# Altium PCB LimeSDR-Micro_mPCIe_1v4.PcbDoc (part 9 of 11)
Units mm, origin at the board's own origin, x right, y up, seen from the top; angles counter-clockwise.
Board outline 50.8 x 29.7 mm, 8 copper layers (Top, L2, L3, L4, L5, L6, L7, Bottom), stack 0.925 mm thick; 664 components, 386 nets, 2358 pads, 843 vias.
Unrouted connection lines stored in the file: 28.
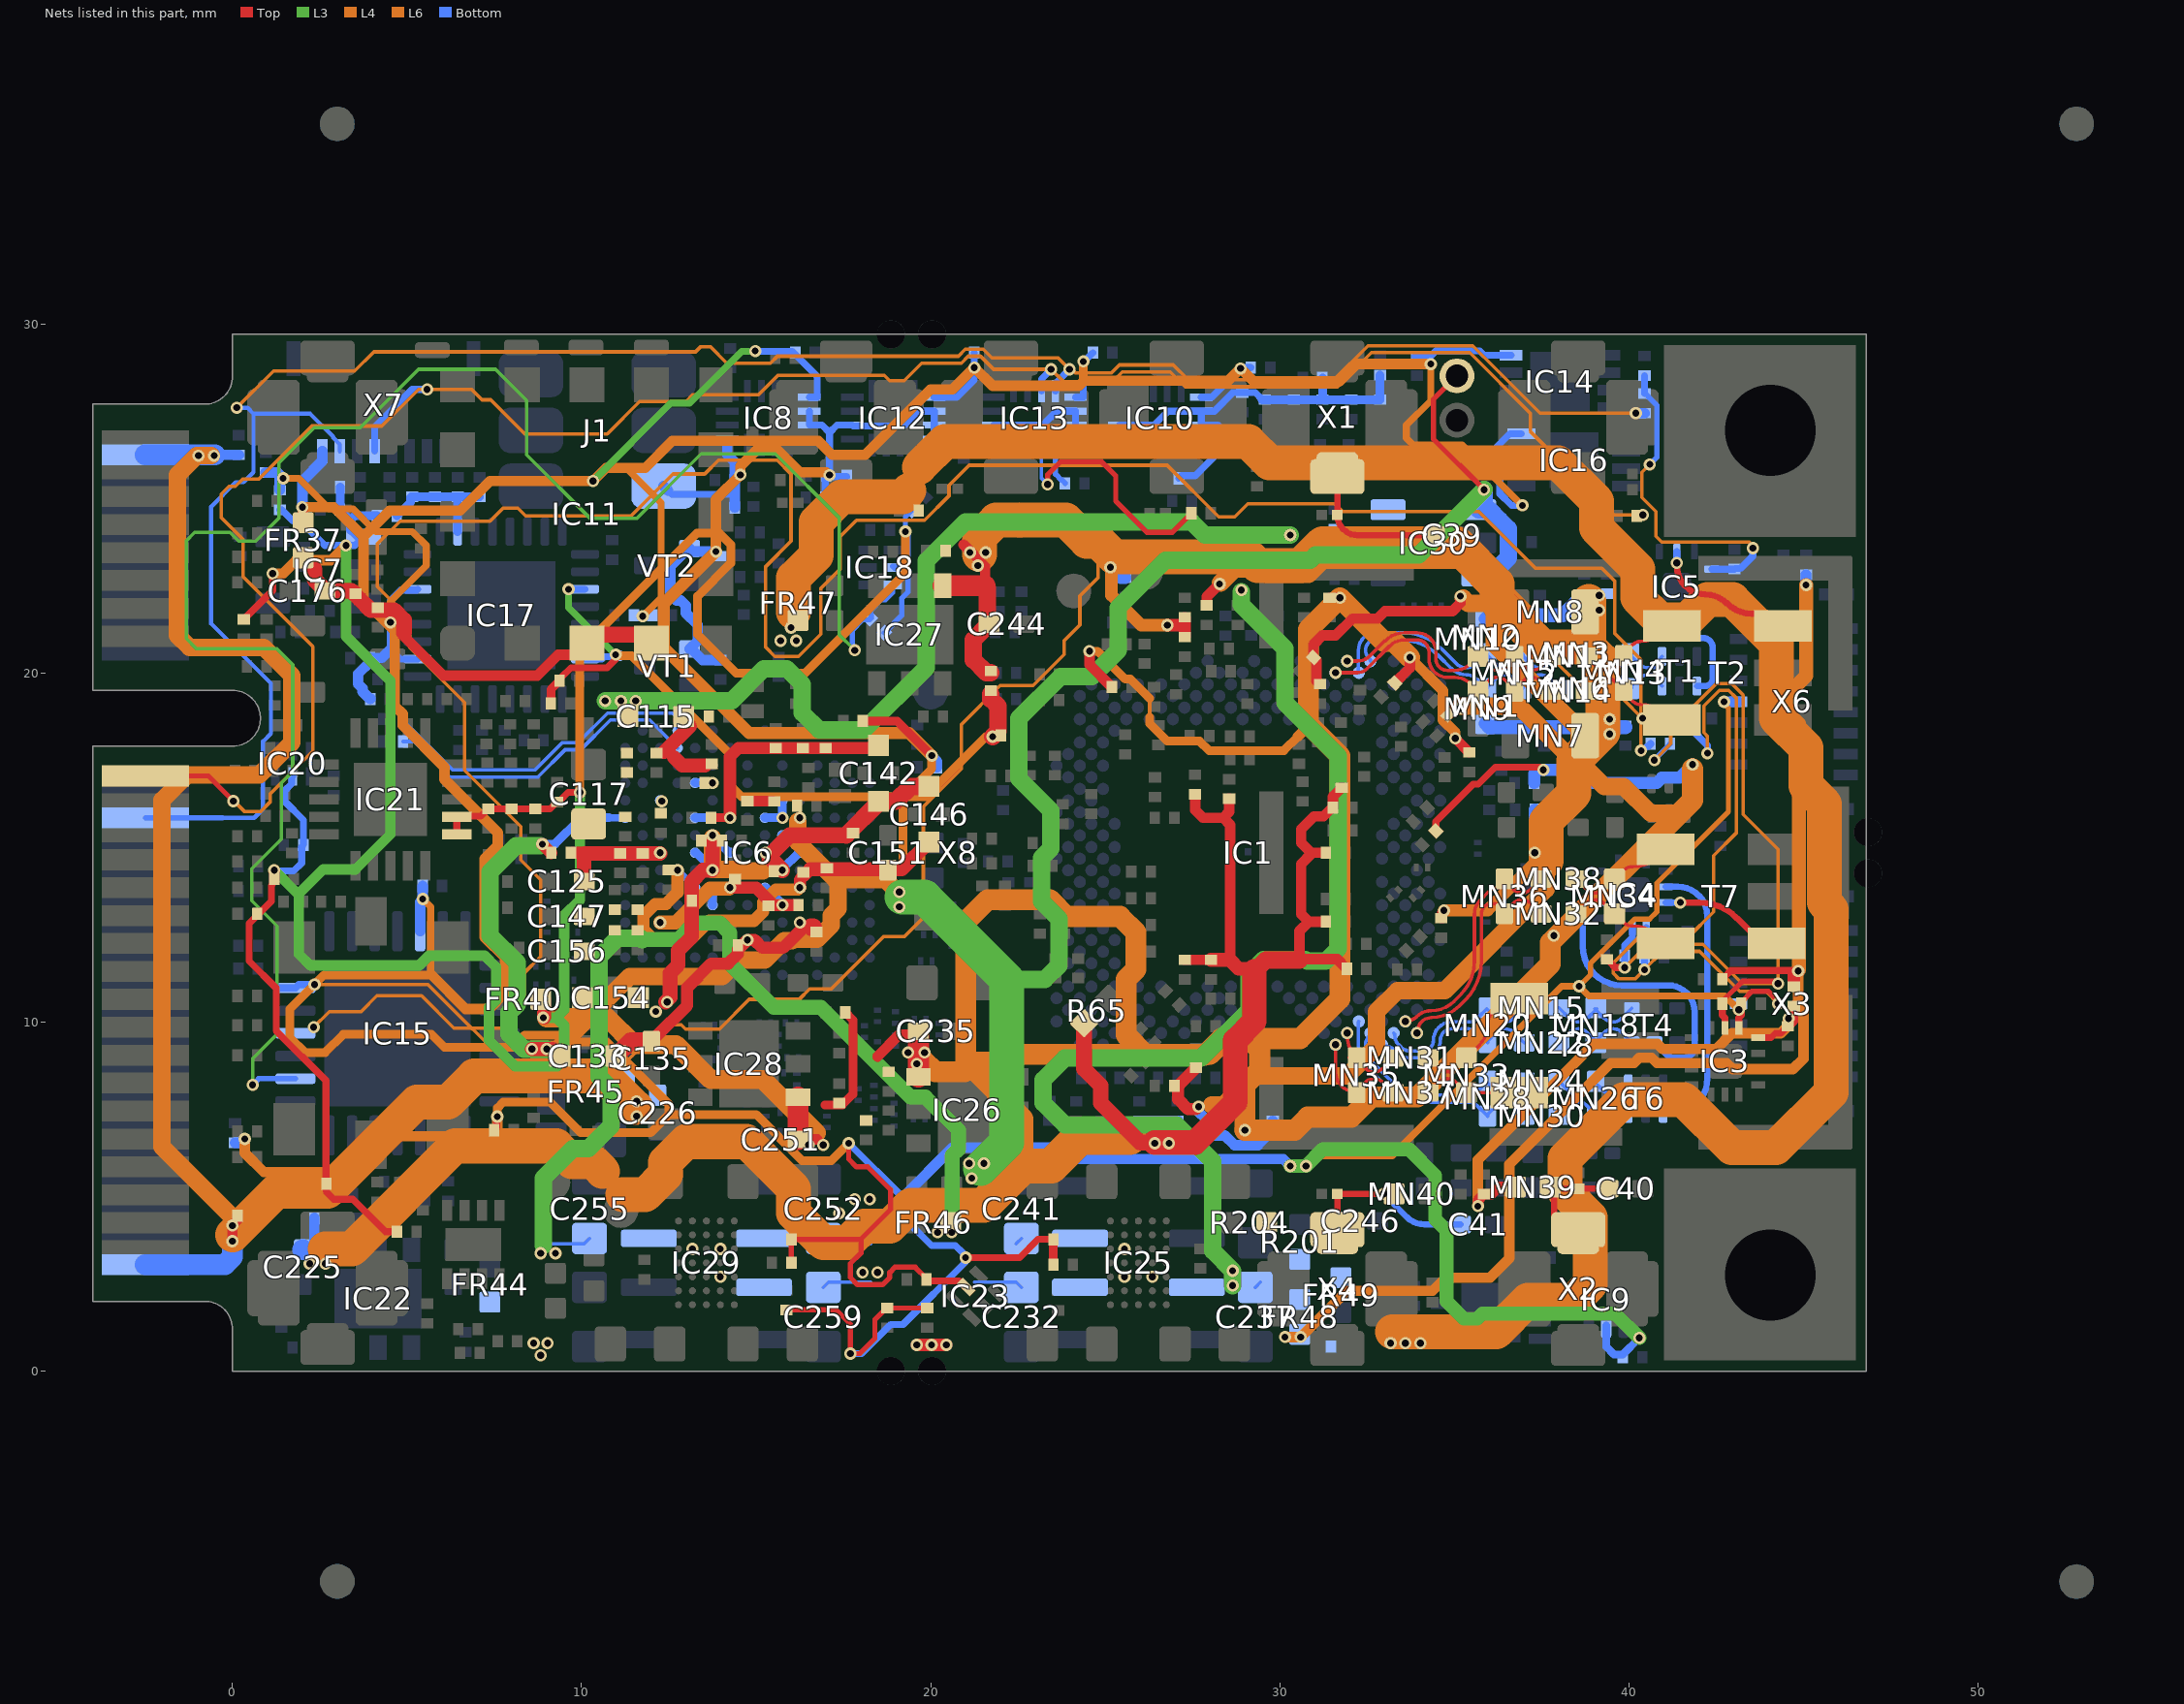
[diagram p13: the nets of this part, all layers, seen from the top]

## Via types
v1: diameter 0.35, hole 0.2, Top to Bottom, tented both sides, 684 vias
v2: diameter 0.35, hole 0.2, L5 to Bottom, tented both sides, 117 vias
v3: diameter 0.4, hole 0.2, Top to Bottom, tented both sides, 30 vias
v4: diameter 0.5, hole 0.2, Top to Bottom, tented both sides, 12 vias

## Nets (pads, with @x,y where several pads share a name; then routed paths per layer and width w, separated by ;. In a path a pad name is that pad's centre, name@x,y a point inside that pad or via, vN(x,y) a via of type N, cw(c..) or ccw(c..) an arc to the next point about the centre after c; other vN are vias at no path point) (continued)
RX1_W_A_N: IC1.AP10 MN35.1 MN37.2 | length 3
  Top w0.1: v1(31.598,9.351) 31.598,8.577 ccw(c32.175,8.577) 32.175,8 32.443,8.268 cw(c32.701,8.01) 32.701,8.375 ; 32.699,8.375 cw(c32.699,8.01) 32.957,8.268 MN37.2@33.25,7.975
RX1_W_A_P: IC1.AN9 MN31.2 MN35.2 | length 2.4
  Top w0.1: v1(31.931,9.684) 31.931,9.626 ccw(c32.851,9.626) MN35.2@32.2,8.975 MN35.2@31.995,8.975 ; MN35.2@32.175,8.95 32.443,8.682 ccw(c32.701,8.94) 32.701,8.575 ; 32.699,8.575 ccw(c32.699,8.94) 32.957,8.682 MN31.2@33.25,8.975
RX1_W_B_N: MN33.1 MN37.1 T8.4 | length 2.9
  Top w0.1: MN37.1@34.25,7.975 34.543,8.268 cw(c34.801,8.01) 34.801,8.375 ; 34.799,8.375 cw(c34.799,8.01) 35.057,8.268 MN33.1@35.325,8 ; MN33.1@35.35,7.975 T8.4@36.86,7.975
RX1_W_B_P: MN31.1 MN33.2 T8.6 | length 3.8
  Top w0.1: MN31.1@34.25,8.975 34.543,8.682 ccw(c34.801,8.94) 34.801,8.575 ; 34.799,8.575 ccw(c34.799,8.94) 35.057,8.682 MN33.2@35.325,8.95 ; MN33.2@35.35,8.975 35.72,9.345 ccw(c35.165,9.9) 35.95,9.9 ; 35.95,9.934 cw(c36.411,9.934) 36.085,10.26 36.085,10.27 36.227,10.412 36.237,10.412 cw(c36.86,9.789) T8.6@36.86,10.67
RX2_H: IC4.2 T6.1 | length 8.2
  Bottom w0.18: T6.1@40.983,7.38 41.244,7.38 ccw(c41.244,8.386) 42.25,8.386 42.25,13.029 ccw(c41.404,13.029) 41.404,13.875 IC4.2@41.053,13.875
RX2_H_A_N: IC1.AM8 MN28.1 MN30.2 | length 6.7
  Bottom w0.1: IC1.AM8@32.264,10.017 32.256,10.009 32.256,9.343 ccw(c33.175,9.343) 32.525,8.692 32.961,8.256 ccw(c34.293,9.589) 34.293,7.705 35.07,7.705 35.401,7.705 cw(c35.401,7.34) 35.659,7.598 MN28.1@35.927,7.33 ; MN28.1@35.952,7.305 MN28.1@35.927,7.33 ; MN30.2@37.002,7.305 36.709,7.598 ccw(c36.451,7.34) 36.452,7.704 ccw(c36.453,7.34) 36.196,7.598 MN28.1@35.927,7.33
RX2_H_A_P: IC1.AN7 MN24.2 MN28.2 | length 6
  Bottom w0.1: IC1.AN7@32.597,9.684 cw(c32.494,9.684) 32.566,9.611 ccw(c32.834,9.344) 32.456,9.344 ccw(c33.178,9.344) 32.667,8.833 33.1,8.4 ccw(c34.296,9.596) 34.296,7.905 35.07,7.905 ; 35.073,7.905 35.401,7.905 ccw(c35.401,8.269) 35.659,8.011 35.927,8.28 36.196,8.011 ccw(c36.453,8.269) 36.452,7.905 ccw(c36.451,8.269) 36.709,8.011 MN24.2@37.002,8.305
RX2_H_B_N: MN26.1 MN30.1 T6.3 | length 2.7
  Bottom w0.1: MN30.1@38.002,7.305 38.296,7.598 cw(c38.553,7.34) 38.553,7.705 ; 38.551,7.705 cw(c38.551,7.34) 38.809,7.598 MN26.1@39.052,7.355 ; MN26.1@39.027,7.33 MN26.1@39.052,7.355 ; MN26.1@39.077,7.33 MN26.1@39.052,7.355 ; T6.3@39.983,7.38 cw(c40.103,7.5) 39.933,7.5 ccw(c39.728,7.5) 39.728,7.705 39.553,7.705 ccw(c39.553,7.34) 39.296,7.598 MN26.1@39.052,7.355
RX2_H_B_P: MN24.1 MN26.2 T6.4 | length 2.7
  Bottom w0.1: MN24.1@38.002,8.305 38.296,8.011 ccw(c38.553,8.269) 38.553,7.905 ; 38.551,7.905 ccw(c38.551,8.269) 38.809,8.011 MN26.2@39.077,8.28 ; MN26.2@39.027,8.28 39.296,8.011 ccw(c39.553,8.269) 39.553,7.905 39.728,7.905 ccw(c39.728,8.109) 39.933,8.109 cw(c40.103,8.109) T6.4@39.983,8.23
RX2_L: IC4.9 T4.2 | length 8.4
  Bottom w0.18: IC4.9@39.148,13.425 39,13.425 ccw(c39,13.1) 38.778,13.337 ccw(c39,13.1) 38.675,13.1 38.675,12.175 ccw(c39.8,12.175) 39.8,11.05 41.129,11.05 cw(c41.129,10.295) 41.885,10.295 41.885,9.28 cw(c41.585,9.28) 41.585,8.98 41.31,8.98 cw(c41.31,9.317) 41.071,9.079 T4.2@40.735,9.415
RX2_L_A_N: IC1.AP6 MN20.1 MN22.2 | length 5.1
  Bottom w0.1: IC1.AP6@32.93,9.351 ccw(c33.012,9.433) 33.012,9.317 cw(c33.012,8.971) 33.256,9.216 ; 33.257,9.216 33.336,9.136 ccw(c33.724,9.524) 33.724,8.975 34.1,8.975 ccw(c34.1,9.475) 34.6,9.475 cw(c34.93,9.475) 34.93,9.805 35.401,9.805 cw(c35.401,9.44) 35.659,9.698 MN20.1@35.927,9.43 ; MN20.1@35.952,9.405 MN20.1@35.927,9.43 ; MN22.2@37.002,9.405 36.709,9.698 ccw(c36.451,9.44) 36.452,9.805 ccw(c36.453,9.44) 36.196,9.698 MN20.1@35.927,9.43
RX2_L_A_P: IC1.AN5 MN15.2 MN20.2 | length 4.9
  Bottom w0.1: IC1.AN5@33.263,9.684 cw(c33.18,9.602) 33.297,9.602 ccw(c33.643,9.602) 33.398,9.357 33.477,9.277 ccw(c33.725,9.525) 33.725,9.175 34.1,9.175 ccw(c34.1,9.475) 34.4,9.475 cw(c34.93,9.475) 34.93,10.005 35.401,10.005 ccw(c35.401,10.369) 35.659,10.111 35.927,10.38 36.196,10.111 ccw(c36.453,10.369) 36.452,10.005 ccw(c36.451,10.369) 36.709,10.111 MN15.2@37.002,10.405
RX2_L_B_N: MN18.1 MN22.1 T4.3 | length 2.7
  Bottom w0.1: MN22.1@38.002,9.405 38.296,9.698 cw(c38.553,9.44) 38.552,9.805 cw(c38.552,9.44) 38.809,9.698 MN18.1@39.052,9.455 ; MN18.1@39.027,9.43 MN18.1@39.052,9.455 ; MN18.1@39.077,9.43 MN18.1@39.052,9.455 ; T4.3@40.085,9.415 39.794,9.705 ccw(c39.553,9.464) 39.553,9.805 ccw(c39.553,9.44) 39.296,9.698 MN18.1@39.052,9.455
RX2_L_B_P: MN15.1 MN18.2 T4.4 | length 2.7
  Bottom w0.1: MN15.1@38.002,10.405 38.296,10.111 ccw(c38.553,10.369) 38.552,10.005 ccw(c38.552,10.369) 38.809,10.111 MN18.2@39.052,10.354 ; MN18.2@39.027,10.38 MN18.2@39.052,10.354 ; MN18.2@39.077,10.38 MN18.2@39.052,10.354 ; T4.4@40.085,10.395 39.794,10.104 cw(c39.553,10.345) 39.553,10.005 cw(c39.553,10.369) 39.296,10.111 MN18.2@39.052,10.354
RX2_W: IC4.3 T7.3 | length 3.5
  Top w0.18: v1(41.475,13.425) 42.014,13.425 cw(c42.014,11.889) 43.1,12.975 43.553,12.522 ccw(c44.197,13.165) T7.3@44.197,12.255
  Bottom w0.18: IC4.3@41.053,13.425 v1(41.475,13.425)
RX2_W_A_N: IC1.AM4 MN36.1 MN38.2 | length 7
  Top w0.1: v1(33.596,10.017) cw(c33.678,9.935) 33.678,10.051 ccw(c33.678,10.397) 33.923,10.152 ; 33.923,10.153 cw(c34.338,9.738) 34.338,10.325 ccw(c34.338,11.258) 34.998,10.598 35.168,10.768 ccw(c34.187,11.75) 35.575,11.75 35.575,13.087 cw(c36.149,13.087) 35.743,13.493 35.974,13.724 ; 35.974,13.724 cw(c36.278,13.42) 36.278,13.85 36.456,13.85 MN36.1@36.547,13.941 ; MN36.1@36.438,14.1 36.413,14.075 MN36.1@36.547,13.941 ; MN38.2@37.488,14.1 37.195,13.807 cw(c36.937,14.065) 36.938,13.7 cw(c36.939,14.065) 36.681,13.807 MN36.1@36.547,13.941
RX2_W_A_P: IC1.AN3 MN32.2 MN36.2 | length 6.6
  Top w0.1: v1(33.929,9.684) ccw(c33.846,9.766) 33.963,9.766 cw(c34.309,9.766) 34.064,10.011 cw(c34.339,9.736) 34.339,10.125 ccw(c34.34,11.256) 35.139,10.456 35.311,10.628 ccw(c34.19,11.749) 35.775,11.749 35.775,13.087 cw(c36.088,13.087) 36.088,13.4 cw(c36.088,13.159) 36.258,13.329 36.438,13.15 36.681,13.393 cw(c36.939,13.135) 36.938,13.5 cw(c36.937,13.135) 37.195,13.393 MN32.2@37.488,13.1
RX2_W_B_N: MN34.1 MN38.1 T7.6 | length 3.1
  Top w0.1: MN38.1@38.488,14.1 38.781,13.807 ccw(c39.039,14.065) 39.039,13.7 ; 39.037,13.7 ccw(c39.037,14.065) 39.295,13.807 MN34.1@39.563,14.075 ; MN34.1@39.588,14.1 39.806,14.318 cw(c40.125,13.998) 40.125,14.45 ccw(c40.125,15.483) 40.856,14.753 T7.6@41.048,14.945
RX2_W_B_P: MN32.1 MN34.2 T7.4 | length 2.8
  Top w0.1: MN32.1@38.488,13.1 38.781,13.393 cw(c39.039,13.135) 39.039,13.5 ; 39.037,13.5 cw(c39.037,13.135) 39.295,13.393 MN34.2@39.563,13.125 ; MN34.2@39.806,12.882 ccw(c40.125,13.202) 40.125,12.75 cw(c40.125,11.717) 40.856,12.447 T7.4@41.048,12.255
RX_SW2: IC15.25 R60.2 | length 76.3
  L4 w0.1: v1(2.325,9.85) 2.775,10.3 3.683,10.3 4.133,10.75 5.417,10.75 6.342,9.825 7.675,9.825 8.35,10.5 8.35,11.4 8.825,11.875 8.825,14.075 8.262,14.638 8.262,15.595 6.65,17.208 6.65,19.15 5.075,20.725 5.075,21.55 4.15,22.475 4.15,23.7 4.8,24.35 7.375,24.35 7.75,24.725 8.175,24.725 8.4,24.5 11.417,24.5 12.617,25.7 13.525,25.7 13.925,26.1 15.6,26.1 16,25.7 16,23.775 15.275,23.05 15.275,20.738 15.538,20.475 16.212,20.475 16.85,21.113 16.85,22.425 17.4,22.975 17.4,23.9 17.875,24.375 19.825,24.375 20.525,25.075 20.525,25.375 21.1,25.95 26.775,25.95 28.25,24.475 28.71,24.475 29.085,24.85 31.575,24.85 31.8,24.625 35.7,24.625 37.325,23 39.225,23 39.6,22.625 39.6,21.125 40.35,20.375 v1(40.35,17.775)
  Bottom w0.2: v1(40.35,17.775) 40.391,17.775 40.516,17.9 40.57,17.9 40.62,17.95 R60.2@40.62,17.975
RX_SW2_DIV: C44.1 C46.1 IC3.6 IC4.6 R60.1 R64.1 | length 22.7
  Top w0.15: C44.1@42.68,10.525 42.73,10.575 42.73,10.643 43.262,11.175 v1@44.2,11.175
  Top w0.2: R64.1@39.375,11.795 39.4,11.795 39.45,11.745 39.45,11.72 39.608,11.562 39.877,11.562 v1(39.879,11.56) ; C44.1@42.68,10.525 42.68,10.195 42.75,10.125 IC3.6@42.75,9.827
  L4 w0.1: v1(39.879,11.56) 40.543,12.225 42.125,12.225 43.25,11.1 v1(44.275,11.1) 44.275,14.95 43.275,15.95 43.275,19.367 42.942,19.7 42.508,19.7 41.2,18.392 41.2,17.97 v1(40.73,17.5)
  Bottom w0.15: v1(40.73,17.5) 40.73,17.525 40.743,17.525 41.18,17.963 R60.1@41.18,17.975
  Bottom w0.2: v1(39.879,11.56) C46.1@39.879,11.91 39.879,12.204 40.1,12.425 IC4.6@40.1,12.697
RX_SW3: IC15.27 R61.2 | length 53
  L6 w0.1: v2(2.35,11.075) 5.6,11.075 8.2,8.475 10.9,8.475 12.35,9.925 12.85,9.925 12.975,9.8 13.95,9.8 14.8,10.65 16.234,10.65 16.534,10.95 17.15,10.95 18.65,12.45 19.25,12.45 19.79,12.99 19.79,16.165 20.875,17.25 20.875,18.525 21.987,19.637 22.938,19.637 23.825,20.525 23.825,20.925 24.275,21.375 24.275,22.209 24.8,22.734 24.8,23.135 25.315,23.65 29.4,23.65 29.825,23.225 30.65,23.225 31.075,23.65 35.4,23.65 37.35,21.7 37.35,20.875 38.975,19.25 39.84,19.25 v2(40.39,18.7)
  Bottom w0.2: IC15.27@1.325,10.975 IC15.27@1.8,10.975 1.9,11.075 v2(2.35,11.075)
RX_SW3_DIV: C45.1 C47.1 IC3.5 IC4.5 R61.1 R63.1 | length 23.7
  Top w0.15: C45.1@43.22,10.573 43.522,10.875 44.002,10.875 44.275,10.602 v1@44.275,10.55
  Top w0.2: IC3.5@43.15,9.827 43.15,10.125 43.22,10.195 C45.1@43.22,10.525 C45.1@43.22,10.573
  L4 w0.1: v1(42.25,17.7) 42.25,18.19 42.15,18.29 42.15,19.06 42.59,19.5 42.86,19.5 43.075,19.285 43.075,15.413 42.429,14.766 42.429,13.154 41.7,12.425 40.284,12.425 39.55,11.691 39.55,11.4 39.715,11.235 40.18,11.235 v1(40.445,11.5) 40.97,12.025 42.025,12.025 43.175,10.875 43.925,10.875 v1(44.275,10.525)
  Bottom w0.2: v1(40.445,11.5) C47.1@40.445,11.85 40.5,11.905 IC4.5@40.5,12.697 ; R61.1@41.175,18.7 R63.1@41.815,18.7 41.815,18.36 42.25,17.925 v1(42.25,17.7)
RXA: C40.1 ESD2.1 MN39.1 X2.1 | length 3.9
  Top w0.18: MN39.1@37.75,5.225 MN39.1@37.8,5.225 ; MN39.1@37.75,5.275 MN39.1@37.8,5.225 ; X2.1@38.25,4.35 X2.1@38.55,4.05 ; X2.1@38.55,3.95 38.25,3.95 37.865,4.335 37.865,5.16 MN39.1@37.8,5.225 ; C40.1@39.35,5.075 39.2,5.225 MN39.1@37.8,5.225
RXB: C41.1 ESD3.1 MN40.1 X4.1 | length 5.2
  Top w0.18: X4.1@31.65,4.05 ESD3.1@31.65,5.075 v1(32.975,5.075) MN40.1@33.275,5.075
  Bottom w0.18: v1(32.975,5.075) 33.637,4.413 ccw(c34.152,4.929) 34.152,4.2 C41.1@35.177,4.2
SMB_CLK_CTRL: IC15.23 IC18.6 R155.1 | length 53.2
  L3 w0.1: v1(0.575,8.2) 0.575,8.95 1.275,9.65 1.275,12.75 0.55,13.475 0.55,14.392 1.4,15.242 1.4,16.85 1.725,17.175 1.725,20.233 1.258,20.7 -1.042,20.7 -1.325,20.983 -1.325,23.785 -1.085,24.025 -0.075,24.025 0.175,23.775 0.667,23.775 1.329,24.437 1.329,26.012 2.342,27.025 3.658,27.025 5.333,28.7 7.534,28.7 8.425,27.809 8.425,26.25 10.25,24.425 11.575,24.425 13.425,26.275 15.55,26.275 17.375,24.45 17.375,21.1 v1(17.825,20.65)
  Bottom w0.15: v1(0.575,8.2) 0.75,8.375 IC15.23@1.8,8.375 ; v1@17.75,20.65 17.787,20.687 17.787,20.742 17.75,20.779 17.75,21.22 18.06,21.53 18.259,21.53 R155.1@18.277,21.548 18.295,21.566 18.295,21.672 18.285,21.681 18.285,21.805 18.58,22.1 18.704,22.1 18.912,22.308 IC18.6@18.912,22.525 IC18.6@18.912,22.55
T0_N: C114.2 IC6.R4 | length 9.6
  Bottom w0.1: C114.2@4.865,18.668 6.314,17.219 8.662,17.219 9.444,18 9.892,18 10.742,18.85 12.6,18.85 12.751,18.699 IC6.R4@12.751,18.35
T0_P: C112.2 IC6.P4 | length 9.3
  Bottom w0.1: C112.2@4.885,18.037 5.213,18.037 6.231,17.019 8.745,17.019 9.526,17.8 9.975,17.8 10.825,18.65 11.951,18.65 IC6.P4@12.751,17.85
TDD0_GPIO: IC13.12 R59.2 X7.2 X8.20 | length 63.8
  L4 w0.1: v1(0.125,27.6) 1.175,28.65 3.5,28.65 4.05,29.2 13.265,29.2 13.415,29.35 13.685,29.35 14.16,28.875 15.409,28.875 15.609,29.075 17.925,29.075 20.792,29.075 20.992,29.275 21.508,29.275 21.758,29.025 23.65,29.025 v1(23.975,28.7)
  L6 w0.1: v1(23.975,28.7) 24.043,28.7 24.143,28.6 25.185,28.6 25.41,28.825 26.95,28.825 27.375,28.4 31.55,28.4 32.525,29.375 35.525,29.375 37.455,27.445 v2(40.2,27.445)
  Bottom w0.12: -0.293,15.85 0.625,15.85 0.875,16.1 0.875,18.04 1.1,18.265 1.1,19.7 -0.61,21.41 -0.61,24.765 0.09,25.465 0.315,25.465 0.6,25.75 0.6,27.425 ; v1(0.125,27.6) 0.425,27.6 0.6,27.425 ; X7.2@3.075,26.35 3.075,26.55 2.885,26.74 2.885,26.766 2.226,27.425 0.6,27.425
  Bottom w0.14: X8.20@-2.5,15.85 -0.293,15.85
  Bottom w0.2: IC13.12@23.575,28.075 23.575,28.3 23.6,28.325 23.605,28.325 v1@23.978,28.697
  Bottom w0.3: v2(40.2,27.445) R59.2@40.45,27.445
TDD0_GPIO_LS: IC13.1 R120.2 | length 1.3
  Bottom w0.15: IC13.1@23.575,26.575 23.575,25.695 23.745,25.525 23.77,25.525 23.845,25.45 R120.2@23.845,25.425
TDD1_GPIO: IC13.11 R229.1 X7.4 X8.17 | length 64.8
  Top w0.14: X8.17@-2.5,17.25 -2.3,17.05 -0.695,17.05 v1(0.025,16.33)
  L4 w0.1: v1@-0.05,16.33 v1(0.025,16.33) 0.045,16.33 0.35,16.025 0.8,16.025 1.075,16.3 1.075,16.533 2.304,17.762 2.304,20.756 0.3,22.76 0.3,23.825 -0.325,24.45 -0.325,25.125 -0.1,25.35 0.085,25.35 0.285,25.55 0.75,25.55 2.275,27.075 4.275,27.075 5.325,28.125 v1(5.575,28.125) 6.85,28.125 7.15,27.825 7.4,27.825 8.375,26.85 10.735,26.85 11.66,27.775 12.992,27.775 13.192,27.975 15.075,27.975 15.625,28.525 18.675,28.525 18.825,28.375 19.24,28.375 19.74,28.875 20.875,28.875 21.075,29.075 21.425,29.075 21.8,28.7 v1(23.45,28.7)
  L6 w0.1: v1(23.45,28.7) 23.8,28.35 25.217,28.35 25.492,28.625 26.867,28.625 27.292,28.2 31.65,28.2 32.625,29.175 35.442,29.175 37.175,27.442 37.175,26.925 39.575,24.525 v1(40.4,24.525)
  Bottom w0.2: X7.4@4.075,26.35 4.075,27.05 5.15,28.125 v1(5.575,28.125) ; IC13.11@23.175,28.075 23.175,28.425 v1(23.45,28.7)
TDD1_GPIO_LS: IC13.2 R121.2 | length 7.2
  Top w0.15: v1(23.35,25.4) 23.35,25.675 23.725,26.05 24.9,26.05 25.3,25.65 25.3,24.925 26.2,24.025 26.915,24.025 R121.2@27.465,24.575
  Bottom w0.1: IC13.2@23.175,26.525 23.175,25.575 v1(23.35,25.4)
TX1_1: IC5.11 T1.1 | length 3
  Bottom w0.18: IC5.11@41.375,21.475 41.375,21.275 ccw(c41.65,21.275) 41.65,21 42.125,21 cw(c42.125,20.725) 42.4,20.725 42.4,19.837 cw(c42.188,19.837) 42.188,19.625 T1.1@41.951,19.625
TX1_1_A_N: IC1.A7 MN1.1 MN5.1 MN6.2 | length 7.2
  Bottom w0.1: IC1.A7@32.597,20.34 ccw(c32.494,20.34) 32.566,20.413 32.546,20.433 cw(c32.766,20.652) 32.456,20.652 cw(c32.766,20.652) 32.546,20.871 cw(c32.736,20.681) 32.736,20.95 33.448,20.95 cw(c33.448,19.395) 34.548,20.494 34.912,20.13 ccw(c35.347,20.565) 35.347,19.95 35.349,19.95 cw(c35.349,19.585) 35.607,19.843 MN1.1@35.9,19.55 36.193,19.843 cw(c36.451,19.585) 36.45,19.95 cw(c36.449,19.585) 36.707,19.843 MN5.1@36.95,19.6 ; MN5.1@36.925,19.575 MN5.1@36.95,19.6 ; MN5.1@36.975,19.575 MN5.1@36.95,19.6 ; MN6.2@38,19.55 37.707,19.843 ccw(c37.449,19.585) 37.45,19.95 ccw(c37.451,19.585) 37.193,19.843 MN5.1@36.95,19.6
TX1_1_A_P: IC1.B8 MN2.1 MN3.1 MN5.2 | length 7.8
  Bottom w0.1: IC1.B8@32.264,20.007 32.256,20.015 32.256,20.653 cw(c32.763,20.653) 32.404,21.012 32.405,21.013 cw(c32.735,20.683) 32.735,21.15 33.531,21.15 cw(c33.531,19.595) 34.631,20.694 35.052,20.273 ccw(c35.349,20.57) 35.349,20.15 ccw(c35.349,20.515) 35.607,20.257 MN2.1@35.875,20.525 ; MN2.1@35.9,20.55 36.193,20.257 ccw(c36.451,20.515) 36.45,20.15 ccw(c36.449,20.515) 36.707,20.257 MN5.2@36.95,20.5 ; MN5.2@36.925,20.525 MN5.2@36.95,20.5 ; MN5.2@36.975,20.525 MN5.2@36.95,20.5 ; MN3.1@38,20.55 37.707,20.257 cw(c37.449,20.515) 37.45,20.15 cw(c37.451,20.515) 37.193,20.257 MN5.2@36.95,20.5
TX1_1_B_N: MN4.2 MN6.1 T1.3 | length 2.6
  Bottom w0.1: MN6.1@39,19.55 39.293,19.843 cw(c39.551,19.585) 39.55,19.95 cw(c39.549,19.585) 39.807,19.843 MN4.2@40.05,19.6 ; MN4.2@40.025,19.575 MN4.2@40.05,19.6 ; MN4.2@40.075,19.575 MN4.2@40.05,19.6 ; T1.3@40.951,19.625 cw(c41.072,19.746) 40.901,19.746 ccw(c40.697,19.746) 40.697,19.95 40.551,19.95 ccw(c40.551,19.585) 40.293,19.843 MN4.2@40.05,19.6
TX1_1_B_P: MN3.2 MN4.1 T1.4 | length 2.6
  Bottom w0.1: MN3.2@39,20.55 39.293,20.257 ccw(c39.551,20.515) 39.55,20.15 ccw(c39.549,20.515) 39.807,20.257 MN4.1@40.05,20.5 ; MN4.1@40.025,20.525 MN4.1@40.05,20.5 ; MN4.1@40.075,20.525 MN4.1@40.05,20.5 ; T1.4@40.951,20.475 ccw(c41.072,20.354) 40.901,20.354 cw(c40.697,20.354) 40.697,20.15 40.551,20.15 cw(c40.551,20.515) 40.293,20.257 MN4.1@40.05,20.5
TX1_2: IC5.5 T2.1 | length 3.4
  Top w0.18: v1(41.375,23.15) 41.375,23.071 ccw(c42.196,23.071) 42.196,22.25 cw(c42.196,21.396) 42.8,22 ccw(c43.524,22.724) 43.524,21.7 T2.1@43.675,21.7 ; T2.1@44.346,21.414 T2.1@44.415,21.345
  Bottom w0.2: v1(41.375,23.15) IC5.5@41.375,23.475
TX1_2_A_N: IC1.B10 MN9.1 MN12.2 MN14.1 | length 8
  Top w0.1: v1(31.597,20.007) 32.218,20.007 ccw(c32.218,20.402) 32.498,20.123 33.148,20.773 cw(c33.575,20.346) 33.575,20.95 33.925,20.95 cw(c33.925,20.6) 34.275,20.6 34.275,20.4 ccw(c34.8,20.4) 34.8,19.875 35.012,19.875 cw(c35.012,19.24) 35.461,19.689 MN9.1@35.675,19.475 35.968,19.768 cw(c36.226,19.51) 36.225,19.875 cw(c36.224,19.51) 36.482,19.768 36.725,19.525 MN12.2@36.7,19.5 ; MN12.2@36.7,19.5 36.968,19.768 cw(c37.226,19.51) 37.225,19.875 cw(c37.224,19.51) 37.482,19.768 MN14.1@37.775,19.475
TX1_2_A_P: IC1.A9 MN10.1 MN11.2 MN12.1 | length 7.7
  Top w0.1: v1(31.931,20.34) 32.217,20.34 ccw(c32.217,20.86) 32.584,20.492 ; 32.631,20.539 32.585,20.492 ; MN11.2@37.775,20.475 37.482,20.182 cw(c37.224,20.44) 37.225,20.075 cw(c37.226,20.44) 36.968,20.182 36.7,20.45 36.725,20.425 36.482,20.182 cw(c36.224,20.44) 36.225,20.075 cw(c36.226,20.44) 35.968,20.182 MN10.1@35.675,20.475 35.461,20.261 cw(c35.012,20.71) 35.012,20.075 34.8,20.075 cw(c34.8,20.4) 34.475,20.4 34.475,20.6 ccw(c33.925,20.6) 33.925,21.15 33.574,21.15 ccw(c33.574,20.348) 33.007,20.915 32.584,20.492
TX1_2_B_N: MN13.1 MN14.2 T2.4 | length 3.1
  Top w0.1: MN14.2@38.775,19.475 39.068,19.768 cw(c39.326,19.51) 39.326,19.875 ; 39.324,19.875 cw(c39.324,19.51) 39.582,19.768 MN13.1@39.85,19.5 ccw(c39.971,19.5) 39.885,19.415 40.112,19.188 ccw(c40.325,19.402) 40.325,19.1 cw(c40.325,17.977) 41.119,18.771 T2.4@41.235,18.655
TX1_2_B_P: MN11.1 MN13.2 T2.6 | length 3.1
  Top w0.1: MN11.1@38.775,20.475 39.068,20.182 ccw(c39.326,20.44) 39.326,20.075 ; 39.324,20.075 ccw(c39.324,20.44) 39.582,20.182 MN13.2@39.85,20.45 ; MN13.2@39.85,20.5 cw(c39.971,20.5) 39.885,20.585 40.112,20.812 cw(c40.325,20.598) 40.325,20.9 ccw(c40.325,22.023) 41.119,21.229 T2.6@41.235,21.345
TX_SW_DIV: C42.1 IC5.7 R59.1 R62.1 | length 9.5
  L6 w0.1: v1(40.6,25.975) 40.375,25.75 40.375,25.025 40.775,24.625 40.775,23.913 40.938,23.75 43.45,23.75 v2@43.55,23.65
  Bottom w0.15: R59.1@40.45,28.005 40.475,28.005 40.55,27.93 40.55,27.917 40.8,27.667 40.8,26.175 v1(40.6,25.975)
  Bottom w0.2: R59.1@40.45,28.005 R62.1@40.45,28.52 ; IC5.7@42.375,22.975 C42.1@43.02,22.975 43.034,22.989 43.189,22.989 43.55,23.35 v2(43.55,23.575)
TXA: C39.1 ESD1.1 X1.1 | length 4.3
  Top w0.18: X1.1@31.65,25.725 X1.1@31.65,25.625 ESD1.1@31.65,24.525 ccw(c32.225,24.525) 32.225,23.95 C39.1@34.425,23.95
VCC0P9: C137.2 C138.2 C139.2 C140.2 C141.2 C142.1 C146.1 C154.1 C232.2 IC6.G6 IC6.G10 IC6.H5 IC6.H7 IC6.H9 IC6.H11 IC6.J6 IC6.J10 IC25.C4 L2.2 | length 19.1
  Top w0.3: v1(20.45,0.75) v1@20.475,0.75
  Top w0.35: v1(19.6,0.75) v1(20.025,0.75) v1(20.45,0.75)
  Top w0.42: v1@12.4,10.575 12.533,10.708 12.533,11.398 12.766,11.631 12.766,12.051 13.15,12.435 13.15,14.025 13.475,14.35 v1(13.751,14.35) 13.751,15.1
  Top w0.45: v1(15.751,14.35) 15.375,14.726 15.375,14.767 15.958,15.35 17.575,15.35
  Top w0.5: 17.575,15.35 18.5,16.275 C142.1@18.5,16.325 19,16.325 19.425,16.75 C146.1@19.95,16.75
  L6 w0.5: v1@13.75,14.375 v1@13.75,15.275 ; v1@13.8,14.375 14.475,14.375 14.525,14.325 15.2,14.325 15.45,14.575
  Bottom w0.1: 21.25,2.55 22.45,2.55 C232.2@22.6,2.4
  Bottom w0.25: IC6.H5@13.251,14.85 13.264,14.85 13.289,14.825 13.306,14.825 13.726,14.405 13.726,14.389 13.751,14.364 v1(13.751,14.35) ; v1(13.751,15.35) 13.751,15.336 13.776,15.311 13.776,15.295 14.196,14.875 14.212,14.875 14.237,14.85 IC6.H7@14.251,14.85 ; IC6.H9@15.251,14.85 v1(15.264,14.85) 15.289,14.875 15.342,14.875 15.751,15.284 IC6.J10@15.751,15.35 ; v1(15.751,14.35) 15.751,14.364 15.776,14.389 15.776,14.405 16.196,14.825 16.212,14.825 16.237,14.85 IC6.H11@16.251,14.85
  other v1: 25.55,2.7 12.125,10.3 12.45,10.575
VCC0P9_AFE_CVDD: C146.3 C150.2 C151.2 C152.2 C153.2 IC6.F5 IC6.F11 | length 12.7
  Top w0.35: v1(16.251,13.85) 16.251,14.076 16.4,14.225 16.55,14.375
  Top w0.4: 16.55,14.375 17.025,14.375 18.775,14.375 19.175,14.375 C146.3@19.95,15.15
  L6 w0.35: v1(12.751,14.35) 12.751,13.714 12.418,13.38 12.109,13.38 11.776,13.047 11.776,12.653 12.054,12.375 13.14,12.375 13.665,12.9 14.937,12.9 15.201,13.164 15.201,13.436 15.565,13.8 16.201,13.8 v1(16.251,13.85)
  Bottom w0.2: v1(12.751,14.35) IC6.F5@13.251,13.85
VCC0P9_AFE_SVDD: C147.2 C148.1 C149.1 C154.3 C155.2 C156.2 C157.2 C158.2 C159.2 C160.2 IC6.D3 IC6.E6 IC6.E10 IC6.F7 IC6.F9 | length 6.1
  Top w0.35: v1(14.251,13.85) 15,13.85 15.5,13.35 v1(15.751,13.35) C148.1@16.19,13.35
  L6 w0.4: v1(12.251,12.85) 12.7,12.85 13.675,13.825 v1@14.226,13.825
  Bottom w0.25: IC6.E6@13.751,13.35 13.751,13.651 13.95,13.85 v1(14.251,13.85) ; IC6.F9@15.251,13.85 15.264,13.85 15.289,13.825 15.306,13.825 15.741,13.39 15.741,13.36 v1(15.751,13.35)
VCC0P9_SD_SVDD: C142.3 C143.2 C144.2 C145.2 IC6.K5 IC6.K7 R81.2 | length 7.5
  Top w0.25: R81.2@13.705,15.85 v1(14.251,15.85)
  Top w0.35: v1(14.251,15.85) 14.25,15.851 14.25,17.6 14.5,17.85 15.075,17.85 15.85,17.85 16.5,17.85 18.275,17.85 C142.3@18.35,17.925
  Bottom w0.25: IC6.K5@13.251,15.85 v1(14.251,15.85)
VCC1P4_LMS: C235.2 FR9.2 FR21.2 FR22.2 FR23.2 FR24.2 IC26.4 R194.2 R195.1 | length 64
  Top w0.2: FR9.2@34.473,15.473 34.473,15.748 35.54,16.815 35.685,16.815 36.17,17.3 37.475,17.3 v1(37.55,17.225)
  Top w0.3: 18.475,9.015 19.096,9.636 19.646,9.636 C235.2@19.65,9.64 ; FR24.2@27.909,21.935 27.909,22.184 v1(28.275,22.55)
  Top w0.6: IC26.4@19.65,8.425 C235.2@19.65,9.64
  L4 w0.6: v1(29,6.9) 30.425,6.9 30.8,7.275 32.05,7.275 32.625,7.85 33.938,7.85 37.75,11.662 37.75,12.275 41.825,16.35 v1@41.825,17.25
  L6 w0.5: v1@28.3,22.575 28.7,22.975 29.475,22.975 29.625,22.825 30.825,22.825 31.225,23.225 35.143,23.225 36.15,22.218 36.15,20.825 38.575,18.4 38.575,17.475 39.3,16.75 39.85,16.75 40.625,15.975 41.367,15.975 41.825,16.433 v1@41.825,17.3
  L6 w0.6: 19.775,8.925 20.125,8.575 20.975,8.575 21.25,8.85 22,8.85 22.225,9.075 28,9.075 28.5,9.575 29.05,9.575 29.425,9.2 29.425,8.625 29,8.2 v1(29,6.9)
  Bottom w0.3: v1(29,6.9) FR22.2@29,7.17 ; FR23.2@37.68,11.7 37.85,11.87 v1(37.85,12.475)
  Bottom w0.35: FR21.2@37.285,16.845 37.285,17.11 37.4,17.225 v1(37.55,17.225) 38.425,17.225 38.805,16.845 40.795,16.845 40.95,17 41.45,17 v1(41.825,17.375)
  other v1: 19.6,8.8 19.35,9.125 19.825,9.125
VCC1P5: C252.2 FR44.1 IC29.C4 L6.2 | length 1.4
  Bottom w0.1: C252.2@16.925,3.8 17.075,3.65 18.275,3.65
  other v1: 8.825,0.45 8.625,0.8 9.025,0.8 13.975,3.5 17.375,4.525 17.825,4.925 18.25,4.925
VCC1P8: C128.2 C129.2 C133.1 C161.2 C163.2 C170.2 C172.2 C241.2 C261.1 IC6.K1 IC6.K9 IC6.K11 IC6.L10 IC8.5 IC8.14 IC8.15 IC10.5 IC10.6 IC10.14 IC10.15 IC12.6 IC12.14 IC12.15 IC12.16 IC13.5 IC13.6 IC13.14 IC13.15 IC13.16 IC25.E4 IC30.1 IC30.3 J1.4 JP1.2 L4.2 R73.1 R74.1 R83.2 R87.2 R89.1 R110.1 R111.1 R112.1 R113.1 R114.1 R115.1 R116.1 R117.1 R118.1 R119.1 R176.1 R185.1 VT1.G VT2.G | length 134.3
  Top w0.15: JP1.2@35.075,28.51 34.4,27.835 34.4,26.7 v1(35.85,25.25)
  Top w0.25: R73.1@18.055,18.625 19.035,18.625 v1(20.03,17.63)
  Top w0.3: C129.2@14.75,16.33 R74.1@15.5,16.33
  Top w0.35: v1(8.875,15.095) R83.2@9.126,14.844 ; C133.1@9.355,9.03 9.355,9.005 C133.1@9.375,9.025
  Top w0.4: v1(8.575,9.225) v1(9,9.225) 9.175,9.225 C133.1@9.375,9.025
  L3 w0.5: v1(8.575,9.225) 8.35,9.225 7.925,9.65 7.925,10.275 8.15,10.5 8.15,11.7 7.375,12.475 7.375,14.3 8.125,15.05 v1@8.825,15.05 ; v1@8.675,9.225 v1(9,9.225) ; 22.175,11.225 23.275,11.225 23.675,11.625 23.675,12.95 23.175,13.45 23.175,14.7 23.443,14.968 23.443,16.057 22.525,16.975 22.525,18.7 23.725,19.9 24.625,19.9 25.375,20.65 25.375,21.875 26.725,23.225 30.875,23.225 31.025,23.375 33.975,23.375 v1(35.85,25.25)
  L3 w1: v1@19.175,13.575 19.825,13.575 22.175,11.225 22.175,6.55 21.425,5.8
  L4 w0.35: v1(13.85,23.475) 12.35,21.975 12.35,20.725 14.8,18.275 19.385,18.275 v1(20.03,17.63)
  L6 w0.25: 18.7,14.075 19.2,14.575 19.2,16.425 20.03,17.255 v1(20.03,17.63)
  L6 w0.3: v1(13.85,23.475) 13.85,24.975 v1(14.55,25.675) 14.55,25.925 15,26.375 15.624,26.375 16.249,25.75 17.006,25.75 17.086,25.67 v2(17.1,25.67)
  L6 w0.45: 16.025,12.35 16.425,12.35
  L6 w0.5: v1(8.575,9.225) v1(9,9.225) 9.3,9.225 11.375,11.3 14.025,11.3 14.5,11.775 15.25,11.775 15.8,12.325 16.025,12.325 ; v1@16.2,15.75 16.2,15.143 17.268,14.075 ; 16.475,12.375 16.75,12.375 17.15,12.775 17.15,13.05 17.35,13.25 17.35,13.993 17.268,14.075 ; v1@19.025,13.75 18.7,14.075 17.268,14.075
  Bottom w0.1: C241.2@22.45,3.65 C241.2@22.6,3.8
  Bottom w0.2: 10.775,15.85 IC6.K1@11.251,15.85 ; J1.4@12.47,25.23 12.584,25.116 14.385,25.116 ; IC8.14@16.525,27.5 IC8.15@16.525,27.1 16.884,27.1 17.1,26.884 ; R118.1@16.98,25.025 C170.2@16.98,25.65 ; C170.2@17.03,25.625 R111.1@17.595,25.625 ; v2(17.1,25.67) 17.1,26.884 ; R117.1@27.105,25.575 27.18,25.65 27.575,25.65 28.35,26.425 28.35,26.975 28.225,27.1 IC10.15@27.75,27.1 IC10.14@27.75,27.5 ; R119.1@29.5,27.83 29.3,28.03 C161.2@28.925,28.03 28.655,28.03 28.125,27.5 IC10.14@27.75,27.5 ; 17.1,26.884 17.316,27.1 IC12.6@17.75,27.1 17.775,27.075 19.225,27.075 19.65,27.5 IC12.14@20.1,27.5 IC12.15@20.1,27.1 IC12.16@20.1,26.7 IC13.5@21.8,26.7 IC13.6@21.8,27.1 23.212,27.1 23.612,27.5 IC13.14@24.15,27.5 IC13.15@24.15,27.1 IC13.16@24.15,26.7 IC10.5@25.4,26.7 IC10.6@25.4,27.1 26.4,27.1 26.8,27.5 IC10.14@27.75,27.5
  Bottom w0.25: v1(8.875,15.095) 9.232,15.095 9.988,15.85 10.775,15.85 ; IC6.K9@15.251,15.85 v1(15.751,15.85) IC6.L10@15.751,16.35 ; R119.1@29.5,27.83 R119.1@29.575,27.83 R114.1@30.4,27.83 R115.1@31.225,27.83 ; C163.2@31.225,28.45 R115.1@31.225,27.83 ; R112.1@32.875,28.53 R116.1@32.875,27.83 R113.1@32.05,27.83 R115.1@31.225,27.83
  Bottom w0.3: J1.4@12.35,25.35 J1.4@12.47,25.23 ; VT1.G@13.095,20.69 VT1.G@13.1,20.69 ; v1@13.725,23.475 13.185,23.475 VT2.G@13.095,23.565 13.045,23.565 12.545,23.065 12.545,22.255 12.725,22.075 12.839,22.075 12.985,21.929 12.985,21.715 13.325,21.375 13.325,20.915 VT1.G@13.1,20.69 ; R176.1@13.974,20.373 13.462,20.373 13.145,20.69 VT1.G@13.1,20.69 ; IC8.5@14.175,26.625 14.175,26.25 14.38,26.045 R89.1@14.38,25.525 ; C172.2@14.385,24.737 14.385,25.116 R89.1@14.385,25.495 ; v1(20.03,17.63) 20.03,17.616 20.18,17.466 R87.2@20.18,17.3
  Bottom w0.5: IC30.3@35.7,22.775 35.75,22.825 36.075,22.825 36.55,23.3 36.55,24.126 36.301,24.375 36.001,24.675 IC30.1@35.855,24.675 ; IC30.1@35.7,24.675 IC30.1@35.855,24.675 ; v1@35.855,25.25 IC30.1@35.855,24.675
  other v1: 25.55,3.5 21.175,5.525 21.1,5.95 21.525,5.95 19.1,13.3 19.1,13.725 16.251,15.85
VCC1P8_AFE_OTVDD: C133.3 C134.2 C135.2 C136.2 IC6.C8 IC6.D11 | length 7.8
  Top w0.35: C135.2@12,9.45 12,9.5 12.075,9.575 12.125,9.575 13.025,10.475 13.025,10.988 13.712,11.675 14.2,11.675 14.48,11.955 14.48,12.079 v1(14.751,12.35) 14.95,12.35 15.175,12.125 15.775,12.125 16.375,12.725 C134.2@16.575,12.725
  Top w0.5: C133.3@10.975,9.025 11.4,9.45 C135.2@12,9.45 ; C134.2@16.575,12.725 C134.2@16.633,12.725
  other v1: 16.251,12.85
VCC1P8_AVDD_PLAT: C125.2 C126.1 C127.1 IC6.H3 R83.1 | length 3.3
  Top w0.35: R83.1@9.743,14.85 10.05,14.85 10.075,14.825
  Top w0.42: C125.2@10.075,14.025 10.075,14.825 v1@12.25,14.825
  other v1: 12.251,14.85
VCC1P8_LMK_VDDO: C187.1 C188.2 C189.2 C190.2 FR39.2 IC17.19 IC17.23 | length 21.7
  Top w0.2: C190.2@9.37,19.775 9.37,19.8 9.42,19.85 9.42,19.873 9.697,20.15 10.733,20.15 10.975,20.392 v1@10.975,20.5
  Top w0.25: C187.1@9.12,19.125 9.12,19.525 9.32,19.725 9.345,19.725 9.37,19.75 C190.2@9.37,19.775
  Top w0.5: FR39.2@21.725,19.395 21.725,19.25 21.925,19.05 21.925,18.325 v1(21.775,18.175)
  L3 w0.2: v1(9.625,22.4) 9.625,21.875 v1(10.975,20.525)
  L4 w0.25: v1@10.975,20.5 11.425,20.5 14.225,17.7 14.225,16.81 14.585,16.45 19.85,16.45 21.575,18.175 v1(21.775,18.175)
  Bottom w0.2: v1(9.625,22.4) IC17.19@10.1,22.4 ; IC17.23@10.1,20.4 10.575,20.4 10.645,20.47 C189.2@10.975,20.47
VCC1P8_LMS: C29.2 C30.2 C31.1 C32.1 C33.2 C34.2 C35.1 C36.1 C244.2 FR25.2 FR26.1 FR27.1 FR28.2 FR29.2 FR30.2 FR31.2 FR32.2 FR39.1 IC27.4 MN1.2 MN2.2 MN7.2 MN8.2 R68.2 R70.2 R71.1 R200.2 R207.1 | length 79.3
  Top w0.3: 20.94,23.675 21.561,23.054 21.561,22.504 21.565,22.5 ; R70.2@31.15,19.68 31.125,19.68 31.125,19.705 31.05,19.78 31.05,20.362 30.948,20.464 30.966,20.481 30.966,20.816 31.225,21.075 31.6,21.075 32.083,21.558 32.798,21.558 33.015,21.775 34.95,21.775 35.175,22 v1(35.175,22.2) ; FR27.1@34.625,12.975 34.65,12.975 34.65,13.131 34.705,13.186 v1(34.705,13.2) ; FR25.2@34.823,18.802 35.01,18.989 v1(35.16,18.989)
  Top w0.35: v1(26.78,21.37) 27.25,21.37 ; R71.1@27.005,8.175 R71.1@27.086,8.175 ; R71.1@27.061,8.15 R71.1@27.086,8.175 ; R71.1@27.111,8.175 R71.1@27.086,8.175 ; FR32.2@27.275,21.075 FR30.2@27.275,21.57 ; FR29.2@27.576,8.665 R71.1@27.086,8.175 ; v1@27.6,7.5 27.375,7.5 27.086,7.789 R71.1@27.086,8.175
  Top w0.5: 21.565,22.5 21.625,22.44 21.625,21.617 C244.2@21.625,21.4 ; C244.2@21.675,21.4 C244.2@21.625,21.4 ; FR39.1@21.725,20.005 21.595,20.005 21.225,20.375 21.225,20.95 21.625,21.35 C244.2@21.625,21.4
  Top w0.6: IC27.4@20.35,22.5 21.565,22.5
  L4 w0.35: 25.175,23.4 25.175,22.225 26.03,21.37 v1(26.78,21.37)
  L4 w0.5: 28.05,7.625 28.4,7.625 29.225,8.45 31.925,8.45 32.775,9.3 32.775,10.3 33.374,10.899 34.724,10.899 37.625,13.8 37.625,14.625 ; v1@35.175,19.05 36.85,19.05 38.425,17.475 ; v1@35.25,22.15 35.4,22 36.275,22
  L4 w1: 21.4,23.4 21.4,23.9 21.875,24.375 23.875,24.375 24.475,23.775 24.8,23.775 25.175,23.4 ; 25.25,23.325 29.125,23.325 29.375,23.075 30.6,23.075 31.225,23.7 35.075,23.7 36.225,22.55 36.225,22.05 ; 36.275,22 37.525,20.75 38.85,20.75 ; 37.625,14.625 37.625,15.75 38.425,16.55 38.425,17.475 39.25,18.3 39.25,20.35 38.85,20.75 ; 38.85,22.05 38.85,20.75
  L6 w0.35: v1(34.705,13.2) 35.95,13.2 37.305,14.555 v1(37.305,14.85)
  Bottom w0.3: v1@27.6,7.5 27.93,7.17 FR28.2@28.15,7.17
  Bottom w0.35: v1(25.15,23.025) 25.445,22.73 R68.2@25.575,22.73 ; v1(37.305,14.85) FR26.1@37.305,16.08
  Bottom w0.4: MN1.2@35.9,18.55 36,18.45 36.234,18.45 C33.2@39.9,18.45 ; MN2.2@35.9,21.55 36,21.65 36.234,21.65 38.105,21.65 38.68,22.225 39.15,21.755 v1(39.15,21.8)
  other v1: 27.675,7.575 39.45,18.25 39.45,18.675 39.15,22.225 21.35,23.075 21.125,23.45 21.575,23.45
VCC1P25_LMS: C225.2 FR4.2 FR5.2 FR6.2 FR7.2 FR8.2 FR10.2 FR11.2 FR12.2 FR13.2 FR14.2 FR15.2 FR16.2 FR17.2 FR18.2 FR19.2 FR20.2 FR51.2 IC22.4 R65.1 R187.2 R189.1 | length 116.3
  Top w0.3: v1(24.55,20.625) 24.55,20.237 FR6.2@25.192,19.595 ; FR16.2@27.275,11.78 FR4.2@28.025,11.78 ; FR17.2@27.58,16.525 27.58,16.07 27.8,15.85 28.375,15.85 ; FR18.2@28.55,16.395 28.55,16.025 28.375,15.85 ; 28.575,11.78 28.575,15.65 28.375,15.85 ; FR51.2@31.245,14.85 30.9,14.85 ; FR10.2@31.32,12.875 30.833,12.875 ; FR19.2@31.425,22.155 v1(31.725,22.155) ; FR7.2@31.797,16.71 FR7.2@31.772,16.71 31.747,16.71 31.747,16.685 31.517,16.455 FR5.2@31.517,16.14 31.501,16.14 31.251,15.89 30.978,15.89 30.615,15.526 30.615,15.135 30.9,14.85 ; FR11.2@31.92,11.525 31.645,11.8 30.565,11.8 30.565,12.607 30.833,12.875 ; FR20.2@33.295,19.713 33.725,20.143 v1(33.725,20.443) ; v1(35.025,18.125) FR8.2@35.426,17.724 ; 30.833,12.875 30.615,13.093 30.615,14.526 30.9,14.812 30.9,14.85
  Top w0.4: FR4.2@28.025,11.78 28.57,11.78 28.825,11.525 29.25,11.525
  Top w0.45: R65.1@24.393,9.968 24.393,8.657 24.875,8.175 24.875,7.675 26,6.55 v1@26.42,6.55
  Top w0.5: 29.275,11.45 29.6,11.775 30.565,11.775
  Top w0.7: v1@26.42,6.55 27.575,6.55 28.725,7.7 28.725,9.475 29.275,10.025 29.275,11.45
  L4 w0.11: 26.269,18.728 26.269,19.276
  L4 w0.25: v1(24.55,20.625) 24.775,20.625 25.575,19.825 25.721,19.825 26.269,19.276 ; 26.269,18.728 26.269,18.556 26.775,18.05 27.7,18.05 27.975,17.775 30.025,17.775 30.116,17.775 30.525,18.184
  L4 w0.3: 30.525,18.184 30.845,18.505
  L4 w0.6: 22.646,5.875 22.646,7.229 21,8.875 21,12.875 21.625,13.5 23.425,13.5 23.9,13.025 25.425,13.025 25.875,12.575 25.875,11.5 25.6,11.225 25.6,9.625 26.175,9.05 27.85,9.05 28.325,9.525 30.587,9.525 31.725,10.663 31.725,17.625 30.845,18.505 ; 30.825,18.6 30.825,21.255 v1(31.725,22.155) 32.978,20.903 33.265,20.903 v1(33.725,20.443)
  L4 w1: 2.66,3.5 3.425,3.5 6.375,6.45 9.275,6.45 9.725,6 10.325,6 10.6,5.725 ; 11.175,5.05 11.825,5.05 12.4,5.625 12.4,5.981 12.994,6.575 14.725,6.575 16.075,5.225 16.075,4.525 16.925,3.675 17.621,3.675 18.096,4.15 18.825,4.15 19.425,4.75 21.521,4.75 22.646,5.875 23.45,5.875 24.275,6.7 25.7,6.7
  L6 w0.3: v1(33.725,20.443) 34.675,19.493 34.675,18.65 35.025,18.3 v1(35.025,18.125)
  Bottom w0.3: C225.2@1.91,3.575 C225.2@2.01,3.475 ; C225.2@2.25,3.5 2.344,3.594 R189.1@2.344,4.367 R189.1@2.344,4.392 ; FR15.2@25.705,6.575 25.705,6.905 25.945,7.145 25.945,7.17 FR14.2@25.97,7.17 27.05,7.17 FR13.2@27.075,7.17 27.1,7.17 27.1,7.12 27.47,6.75 28.425,6.75 28.7,6.475 29.375,6.475 29.8,6.9 FR12.2@29.8,7.17
  Bottom w0.6: 2.41,3.475 IC22.4@3.175,3.475
  other v1: 2.21,3.075 2.66,3.075 26.42,6.525 26.825,6.525
VCC1P35: C115.1 R75.2 R203.2 R206.2 | length 25.6
  L3 w0.5: v1(10.675,19.2) v1(11.125,19.2) v1(11.55,19.2) 14.3,19.2 15.225,20.125 15.875,20.125 16.325,19.675 16.325,18.85 16.8,18.375 18.1,18.375 19.875,20.15 19.875,23.209 20.991,24.325 27.475,24.325 27.85,23.95 v1(30.3,23.95)
VCC1P35_AVDD_SD_PLL: C117.2 C118.2 C122.1 IC6.L3 R75.1
  other v1: 12.3,16.325
VCC1P35_LDO: C262.1 IC30.5 R206.1 R216.1
VCC1P35_SD_XVDD: C115.3 C119.2 C120.2 C121.2 IC6.M5 IC6.M6 R80.2 | length 2.9
  Top w0.3: R80.2@13.531,16.85 v1(13.751,16.85)
  Top w0.4: 12.363,17.738 C115.3@13.1,18.475 ; 12.65,17.584 12.884,17.35 13.531,17.35 ; C115.3@12.826,18.651 C115.3@12.925,18.75
  Bottom w0.25: IC6.M5@13.251,16.85 v1(13.751,16.85)
VCC1P35_SW: C237.2 IC25.C2 L3.2 R203.1 | length 32.2
  L3 w0.5: v1(28.65,2.45) v1(28.65,2.875) 28.075,3.45 28.075,6.017 27.042,7.05 23.85,7.05 23.225,7.675 23.225,8.35 23.85,8.975 27.75,8.975 29.125,10.35 29.125,11.375 29.54,11.79 30.735,11.79 30.785,11.74 31.313,11.74 31.675,12.102 31.675,17.625 30.15,19.15 30.15,20.7 28.9,21.95 v1@28.9,22.325
  Bottom w0.1: C237.2@29.3,2.4 C237.2@29.45,2.55
  other v1: 26.35,2.7 28.9,22.375
VCC1P75: C255.2 FR46.1 IC29.C2 L7.2 | length 27.3
  L3 w0.43: 11.74,12.36 12.761,12.36 13.241,12.84 13.954,12.84 14.241,12.553 14.241,11.684 15.5,10.425 16.85,10.425 19.425,7.85 19.85,7.85 20.79,6.91 20.79,6.354 20.61,6.174 20.61,4.24
  L3 w0.5: 8.9,3.6 8.9,5.525 9.75,6.375 10.2,6.375 10.85,7.025 10.85,8.079 10.5,8.429 10.5,11.867 11.033,12.4 11.7,12.4 11.74,12.36
  Bottom w0.1: 8.875,3.65 10.075,3.65 C255.2@10.225,3.8
  other v1: 8.825,3.375 9.25,3.375 13.175,3.5 20.2,3.975 20.6,3.975
VCC2P05: C259.2 FR47.1 IC29.E4 L8.2 | length 69.1
  L4 w1: 16.075,21.75 16.075,22.725 16.725,23.375 16.725,24.325 17.45,25.05 19.2,25.05 19.375,25.225 ; 19.675,25.9 20.4,26.625 29.104,26.625 29.704,26.025 37.975,26.025 39.075,24.925 39.075,24.154 40.25,22.979 40.25,22.154 40.879,21.525 41.675,21.525 42.25,22.1 42.971,22.1 44.225,20.846 44.225,18.7 45.075,17.85 45.075,16.775 45.6,16.25 45.6,13.425 45.8,13.225 45.8,7.99 44.21,6.4 42.95,6.4 41.575,7.775 39.854,7.775 38.175,6.096 38.175,5.125 38.9,4.4 38.9,2.5 38.425,2.025 37.1,2.025 36.2,1.125 33.225,1.125
  Bottom w0.1: C259.2@16.925,2.4 17.075,2.55 18.275,2.55
  other v1: 33.175,0.8 33.6,0.8 34.025,0.8 13.975,2.7 18.05,2.825 18.475,2.825 15.7,20.925 16.15,20.925 16,21.3
VCC3P3: C162.1 C164.1 C166.1 C171.1 C173.1 C177.1 C179.1 C180.1 C228.1 C246.2 FR37.1 FR48.1 FR49.1 IC8.13 IC9.5 IC10.13 IC12.13 IC13.13 IC14.8 IC15.5 IC16.8 IC23.5 LED1.A LED2.A R130.1 R175.1 R186.1 R188.2 R197.1 R199.1 R201.2 R204.2 R213.1 R214.1 R215.1 X3.8 X6.8 X7.1 | length 217.1
  Top w0.15: R215.1@15.863,1.752 17.293,1.752 17.7,1.345 v1(17.7,0.5) 17.975,0.5 18.4,0.925 18.4,1.475 LED1.A@18.73,1.805 ; R214.1@16.085,3 16.01,3.075 R213.1@16.01,3.775 18,3.775 ; v1(17.65,6.525) 17.65,6.075 17.875,5.85 18.2,5.85 18.85,5.2 18.85,4.625 18,3.775 ; LED1.A@18.705,1.805 LED1.A@18.73,1.805 ; LED1.A@18.74,1.815 LED1.A@18.73,1.805 ; C228.1@19.88,2.625 19.88,2.65 19.555,2.975 18.975,2.975 18.825,2.825 18.825,2.68 18.62,2.475 17.905,2.475 17.7,2.68 17.7,3.078 18,3.378 18,3.775 ; LED2.A@19.9,1.805 LED1.A@18.73,1.805
  Top w0.2: R130.1@7.495,6.9 7.564,6.969 v1@7.564,7.211 ; C228.1@19.88,2.58 20.809,2.58 20.983,2.406 IC23.5@21.019,2.406 ; v1(21,3.25) 22.55,3.25 23.075,3.775 R197.1@23.515,3.775
  Top w0.25: R199.1@23.515,3.05 R197.1@23.515,3.775
  Top w0.3: v1(2,24.75) 2.01,24.74 2.01,24.315 FR37.1@2.025,24.3
  L3 w0.2: v1(10.325,25.5) 12.55,27.725 13.1,27.725 14.588,29.213 v1@14.863,29.213
  L3 w0.4: v1(30.3,5.875) v1(30.75,5.875) 31.225,6.35 33.705,6.35 34.45,5.605 34.45,4.355 34.78,4.025 34.78,1.998 35.278,1.5 35.65,1.5 35.8,1.65 39.6,1.65 v1(40.3,0.95)
  L4 w0.15: v1(38.575,11.025) 38.9,11.35 38.9,11.675 40.175,12.95 40.595,12.95 40.8,13.155 40.8,13.975 42.85,16.025 42.85,18.996 42.725,19.121 v1(42.725,19.175)
  L4 w0.2: v1(5.45,13.525) 5.675,13.3 5.675,11.35 ; v1(17.7,0.5) v1@17.729,0.529 ; v1(30.75,5.875) 31.05,6.175 33.225,6.175 38.075,11.025 v1(38.575,11.025)
  L4 w0.25: 5.675,11.35 2.625,11.35 1.648,10.373 1.648,9.553 2.076,9.125 2.65,9.125 3.175,9.65 5.7,9.65 6.075,9.275 8.025,9.275 8.375,9.625 9.375,9.625 9.575,9.425 10.725,9.425 12.5,7.65 12.5,7.35 ; v1(7.586,7.289) 7.586,7.536 7.75,7.7 9.1,7.7 9.975,6.825 11.975,6.825 12.5,7.35 ; v1(17.65,6.525) 17.15,6.025 16.325,6.025 15,7.35 12.5,7.35 ; v1(24.375,28.925) 24.375,28.4 24.4,28.375
  L4 w0.3: v1(2,24.75) 2.9,24.75 3.75,23.9 ; 5.688,11.362 6.675,10.375 7.35,10.375 7.8,10.825 7.8,11.85 7.225,12.425 7.225,14.674 7.6,15.049 7.6,15.425 6.075,16.95 6.075,17.3 4.875,18.5 4.875,18.825 4.65,19.05 4.65,21.201 3.75,22.101 3.75,23.9 ; v1(34.325,28.85) 32.199,28.85 31.699,28.35 29.25,28.35 v1(28.875,28.725) 28.525,28.375 24.4,28.375 24.25,28.225 21.775,28.225 v1(21.25,28.75) 20.625,28.125 20,28.125 18.125,26.25 17.175,26.25 16.775,26.65 12.6,26.65 11.825,25.875 10.7,25.875 v1(10.325,25.5) 7.375,25.5 6.525,24.65 4.5,24.65 3.75,23.9
  L4 w0.35: v1(30.3,5.875) v1(30.75,5.875)
  L6 w0.2: v1(10.325,25.5) 10.7,25.875 11.275,25.875 12.275,24.875 12.275,22.15 v1(11.75,21.625) ; v1(34.325,28.85) 34.325,27.8 33.625,27.1 33.625,26.725 33.825,26.525 35.22,26.525 36.945,24.8 v1(36.95,24.8) ; v1(38.575,11.025) 38.85,10.75 42.75,10.75 v2(43.15,10.35)
  L6 w0.3: v2(0.35,6.65) 0.35,6.25 0.9,5.7 2.8,5.7 3.825,6.725 7.325,6.725 7.586,6.986 v1(7.586,7.289)
  Bottom w0.2: v1@14.975,29.213 16.034,29.213 16.75,28.497 16.75,28.475 16.75,28.226 16.75,27.9 IC8.13@16.525,27.9 ; v1(17.65,6.525) 19.2,4.975 19.2,4.425 20.025,3.6 20.705,3.6 20.925,3.38 20.925,3.366 21,3.291 v1(21,3.25) 21,3.125 19.212,1.338 18.857,1.338 18.02,0.5 v1(17.7,0.5) ; IC12.13@20.1,27.9 20.75,27.9 21.25,28.4 v1(21.25,28.75) 21.247,28.753 21.247,29.172 C164.1@21.245,29.175 ; IC13.13@24.15,27.9 24.375,27.9 24.375,28.905 C171.1@24.645,29.175 ; IC10.13@27.75,27.9 28.05,27.9 v1(28.875,28.725) 28.97,28.725 28.945,28.75 C173.1@29.17,28.75 ; v1@34.21,28.965 34.47,29.225 35.725,29.225 35.85,29.1 IC14.8@36.625,29.1 ; IC16.8@36.925,26.85 36.592,26.85 36.125,26.383 C177.1@36.125,25.912 36.305,25.732 36.305,25.137 36.642,24.8 v1(36.95,24.8)
  Bottom w0.22: IC9.5@39.35,1.3 39.35,0.7 39.575,0.475 39.825,0.475 v1(40.3,0.95)
  Bottom w0.3: R188.2@0.075,6.54 0.24,6.54 v2(0.35,6.65) ; v1(2,24.75) 2,25.5 2.575,26.075 X7.1@2.575,26.35 ; IC15.5@5.375,12.6 5.375,13.425 5.375,13.439 5.445,13.509 C179.1@5.445,13.9 ; 19.201,4.974 20.626,6.4 23.4,6.4 23.725,6.075 30.099,6.075 v1(30.3,5.875) ; C180.1@33.925,29.08 34.095,29.08 34.21,28.965 v1(34.325,28.85) ; v1(36.95,24.8) v1@36.96,24.79 ; v1(42.725,19.175) X6.8@43.142,19.175
  other v1: 14.975,29.225
VCC3P3_CLK: C131.2 C132.1 C203.2 C206.2 C210.1 C213.2 C214.2 C251.2 FR38.1 FR40.2 FR41.1 FR42.1 FR43.1 IC7.1 IC18.5 IC20.5 IC21.16 IC21.17 IC28.4 R155.2 R157.1 R168.2 R170.1 R190.2 R210.2 R211.1 | length 105.7
  Top w0.2: R190.2@0.325,21.537 0.35,21.537 0.4,21.587 0.4,21.612 1.15,22.363 v1(1.15,22.85) ; C213.2@0.655,13.05 C213.2@0.705,13.1 0.705,13.125 C213.2@0.755,13.175 ; R170.1@1.195,14.1 1.145,14.05 1.145,13.938 1.115,13.908 1.115,13.462 0.475,12.822 0.475,11.75 1.25,10.975 1.25,9.75 2.675,8.325 2.675,5.485 2.69,5.47 R157.1@2.69,5.37 2.69,5.135 2.9,4.925 3.45,4.925 4.38,3.995 FR42.1@4.715,3.995 ; IC21.16@6.425,15.375 IC21.17@6.425,15.875 6.445,15.895 7.115,15.895 7.25,16.03 7.25,16.055 7.3,16.105 C214.2@7.325,16.105 FR43.1@8.675,16.105 9.095,16.105 9.225,16.235 9.225,16.26 9.275,16.31 R168.2@9.3,16.31 9.35,16.36 9.398,16.36 9.613,16.575 v1(9.95,16.575)
  Top w0.25: 16.975,7.625 17.468,7.625 17.775,7.932 17.775,10.055 R210.2@17.555,10.275
  Top w0.3: R170.1@1.195,14.1 v1(1.195,14.35) ; C251.2@16.2,6.635 16.204,6.639 16.754,6.639
  Top w0.4: v1@8.925,10.125 FR40.2@8.925,10.65
  Top w0.6: C251.2@16.2,6.635 IC28.4@16.2,7.85
  L3 w0.3: v1(1.195,14.35) 1.9,13.645 ; v1(3.25,23.65) 3.25,21.05 4.525,19.775 4.525,15.375 3.525,14.375 2.6,14.375 1.9,13.675 1.9,13.645 ; v1(8.9,10.125) 9.275,10.125 ; v1(9.95,16.575) 9.95,13.5 9.5,13.05 9.5,10.35 9.275,10.125 ; 1.9,13.645 1.9,11.95 2.225,11.625 5.35,11.625 5.625,11.9 7.226,11.9 7.55,11.576 7.55,10.624 7.35,10.424 7.35,9.475 8.1,8.725 9.3,8.725 9.5,8.925 9.5,9.9 9.275,10.125
  L4 w0.25: v1(9.95,16.575) 9.95,20.65 13.3,24 13.95,24 14.275,23.675 14.275,23.15 13.325,22.2 13.325,21.1 14.427,19.998 15.816,19.998 16.407,19.998 19.275,22.866 v1(19.275,24.05)
  L4 w0.55: v1@9,10.125 10.732,10.125 11.507,9.35 12.7,9.35 13.7,8.35 15.2,8.35 16.725,6.825
  L6 w0.3: v1(1.15,22.85) 1.45,22.85 1.825,23.225 2.825,23.225 v1(3.25,23.65)
  Bottom w0.15: R155.2@18.673,21.152 19.175,21.654 19.175,22.143 19.35,22.318 19.35,22.825 19.175,23 18.962,23 18.912,23.05 19.125,23.05 19.35,23.275 19.35,23.975 v1(19.275,24.05) 19.275,24.475 C203.2@19.452,24.652
  Bottom w0.2: v1(1.195,14.35) 1.213,14.332 1.757,14.332 1.98,14.555 1.98,15.025 C206.2@2.03,15.075 2.03,15.79 1.5,16.32 1.5,16.63 1.7,16.83 1.7,17.012 IC20.5@1.725,17.037 ; FR41.1@1.355,24.675 1.414,24.675 1.739,24.35 1.945,24.35 2.645,23.65 v1(3.25,23.65) 3.5,23.65 IC7.1@3.75,23.9 3.56,23.9 IC7.1@3.375,24.085
  Bottom w0.25: C132.1@3.08,25.325 3.08,24.67 3.375,24.375 ; IC7.1@3.375,24.085 3.375,24.375 ; FR38.1@4.145,24.5 3.5,24.5 3.375,24.375
  other v1: 16.5,6.475 16.925,6.475
VCC3P3_GNSS: C175.2 C176.2 FR37.2 IC11.14 IC11.15 R108.2 | length 12.4
  Top w0.3: 4.912,21.153 4.912,21.047 6.035,19.925 8.729,19.925 9.329,20.525 IC11.15@9.875,20.525
  Top w0.45: FR37.2@2.025,23.3 2.35,22.975 2.35,22.675 2.67,22.355 3.405,22.355 3.65,22.11 ; 3.805,21.955 3.65,22.11 ; 4.912,21.153 4.912,21.517 4.63,21.8 3.96,21.8 3.65,22.11 ; IC11.15@9.875,20.575 IC11.15@10.15,20.85 ; IC11.15@10.15,21.1 IC11.14@12,21.1
VCC3P3_LMK: C181.1 C182.2 C183.2 FR38.2 IC17.10 R152.1 | length 3.6
  Bottom w0.25: FR38.2@4.705,24.5 4.705,24.525 4.73,24.55 4.755,24.55 5.1,24.895 5.1,25.02 5.125,25.045 C181.1@5.15,25.045 C183.2@5.8,25.045 C182.2@6.45,25.045 R152.1@7.075,25.045 ; IC17.10@6.45,24.05 C182.2@6.45,24.97
VCC3P3_LMK_VDDO: C198.1 C199.2 C200.2 C201.2 FR41.2 IC17.2 IC17.6 | length 14.4
  L6 w0.2: v2(1.45,25.575) 1.9,25.575 2.775,24.7 3.454,24.7 4.104,24.05 5.15,24.05 5.55,23.65 5.55,23.075 4.525,22.05 v2(4.525,21.45) v2@4.525,21.389
  Bottom w0.2: v2(4.525,21.45) 4.525,20.895 ; IC17.2@5.3,20.4 4.8,20.4 4.525,20.675 4.525,20.895 ; IC17.6@5.3,22.4 5.275,22.375 4.825,22.375 4.525,22.075 4.525,20.895
  Bottom w0.3: C200.2@0.95,25.745 1.28,25.745 1.355,25.67 FR41.2@1.355,25.235 ; C201.2@3.945,19.25 3.945,19.275 3.92,19.275 3.725,19.47 3.725,19.559 3.595,19.689 C198.1@3.595,19.825 3.595,19.971 3.93,20.306 C199.2@3.93,20.425 3.93,20.433 4.283,20.433 4.525,20.675
VCC3P3_MPCIE: C226.2 FR45.1 R72.1 R145.2 X8.2 X8.52 | length 50
  Top w0.3: v1(0,3.72) v1(0,4.169) 0,4.182 0.145,4.327 R72.1@0.145,4.45
  L4 w0.5: v1@-1.025,26.225 -1.575,25.674 -1.575,21.075 -1.225,20.725 0.899,20.725 1.704,19.92 1.704,18.01 0.769,17.075 -1.3,17.075 -2.025,16.35 -2.025,6.425 0,4.4 v1(0,4.169) 0,3.9 v1(0,3.72) ; v1(-0.975,26.225) v1@-0.6,26.225
  L4 w1: 0,3.9 1.25,5.15 2.725,5.15 5.275,7.7 6.175,7.7 6.925,8.45 10.65,8.45 11.55,7.55
  Bottom w0.3: v1@-0.45,26.25 R145.2@0.183,26.25
  Bottom w0.6: X8.52@-2.5,3.05 -0.219,3.05 0,3.269 v1(0,3.72) v1(0,4.169) ; X8.2@-2.5,26.25 v1@-0.5,26.25
  other v1: 11.575,7.3 11.575,7.725 -0.525,26.225
VCC3P3_RF: C248.1 FR1.1 FR2.2 FR3.2 FR48.2 | length 37
  Top w0.2: FR3.2@42.68,11.225 42.68,11.25 42.73,11.3 42.755,11.3 42.93,11.475 v1@44.85,11.475
  Top w0.35: FR2.2@44.725,11.065 44.725,11.34 v1(44.85,11.465)
  L4 w0.3: v1(30.15,0.975) v1(30.6,0.975) 31.925,2.3 34.375,2.3 34.75,2.675 36.018,2.675 36.575,3.232 36.575,5.925 39.475,8.825 40.149,8.825 40.299,8.975 40.651,8.975 40.801,8.825 42.8,8.825 42.975,8.65 44.7,8.65 45,8.95 45,10.3 44.85,10.45 v1(44.85,11.465)
  L6 w0.4: v1@44.875,11.49 44.875,18.55 44.525,18.9 44.525,19.372 45.075,19.922 v2(45.075,22.52)
  Bottom w0.3: v2(45.075,22.52) FR1.1@45.075,22.82
VCC3P3_RF_RX1: C37.1 C48.1 FR2.1 IC3.4 MN39.2 | length 15.2
  Top w0.2: IC3.4@43.702,9.55 44.072,9.55 44.197,9.675 44.345,9.675 C48.1@44.55,9.88
  Top w0.3: v1(35.675,4.725) 35.685,4.735 35.685,4.905 35.825,5.045 35.825,5.07 C37.1@35.85,5.07 36.07,5.07 36.275,5.275 MN39.2@36.75,5.275 ; C48.1@44.55,9.88 44.7,10.03 FR2.1@44.7,10.455
  L4 w0.3: v1(35.675,4.725) 35.675,6.05 39,9.375 40.817,9.375 40.967,9.225 42.5,9.225 42.95,9.675 44.35,9.675 44.575,9.9 v1(44.575,10.1)